# Altium PCB C0 DEVB V1R0.PcbDoc
Units mm, origin at the board's own origin, x right, y up, seen from the top; angles counter-clockwise.
Board outline 60 x 60 mm, 2 copper layers (Top Layer, Bottom Layer); 38 components, 40 nets, 183 pads, 7 vias.
Unrouted connection lines stored in the file: 74.
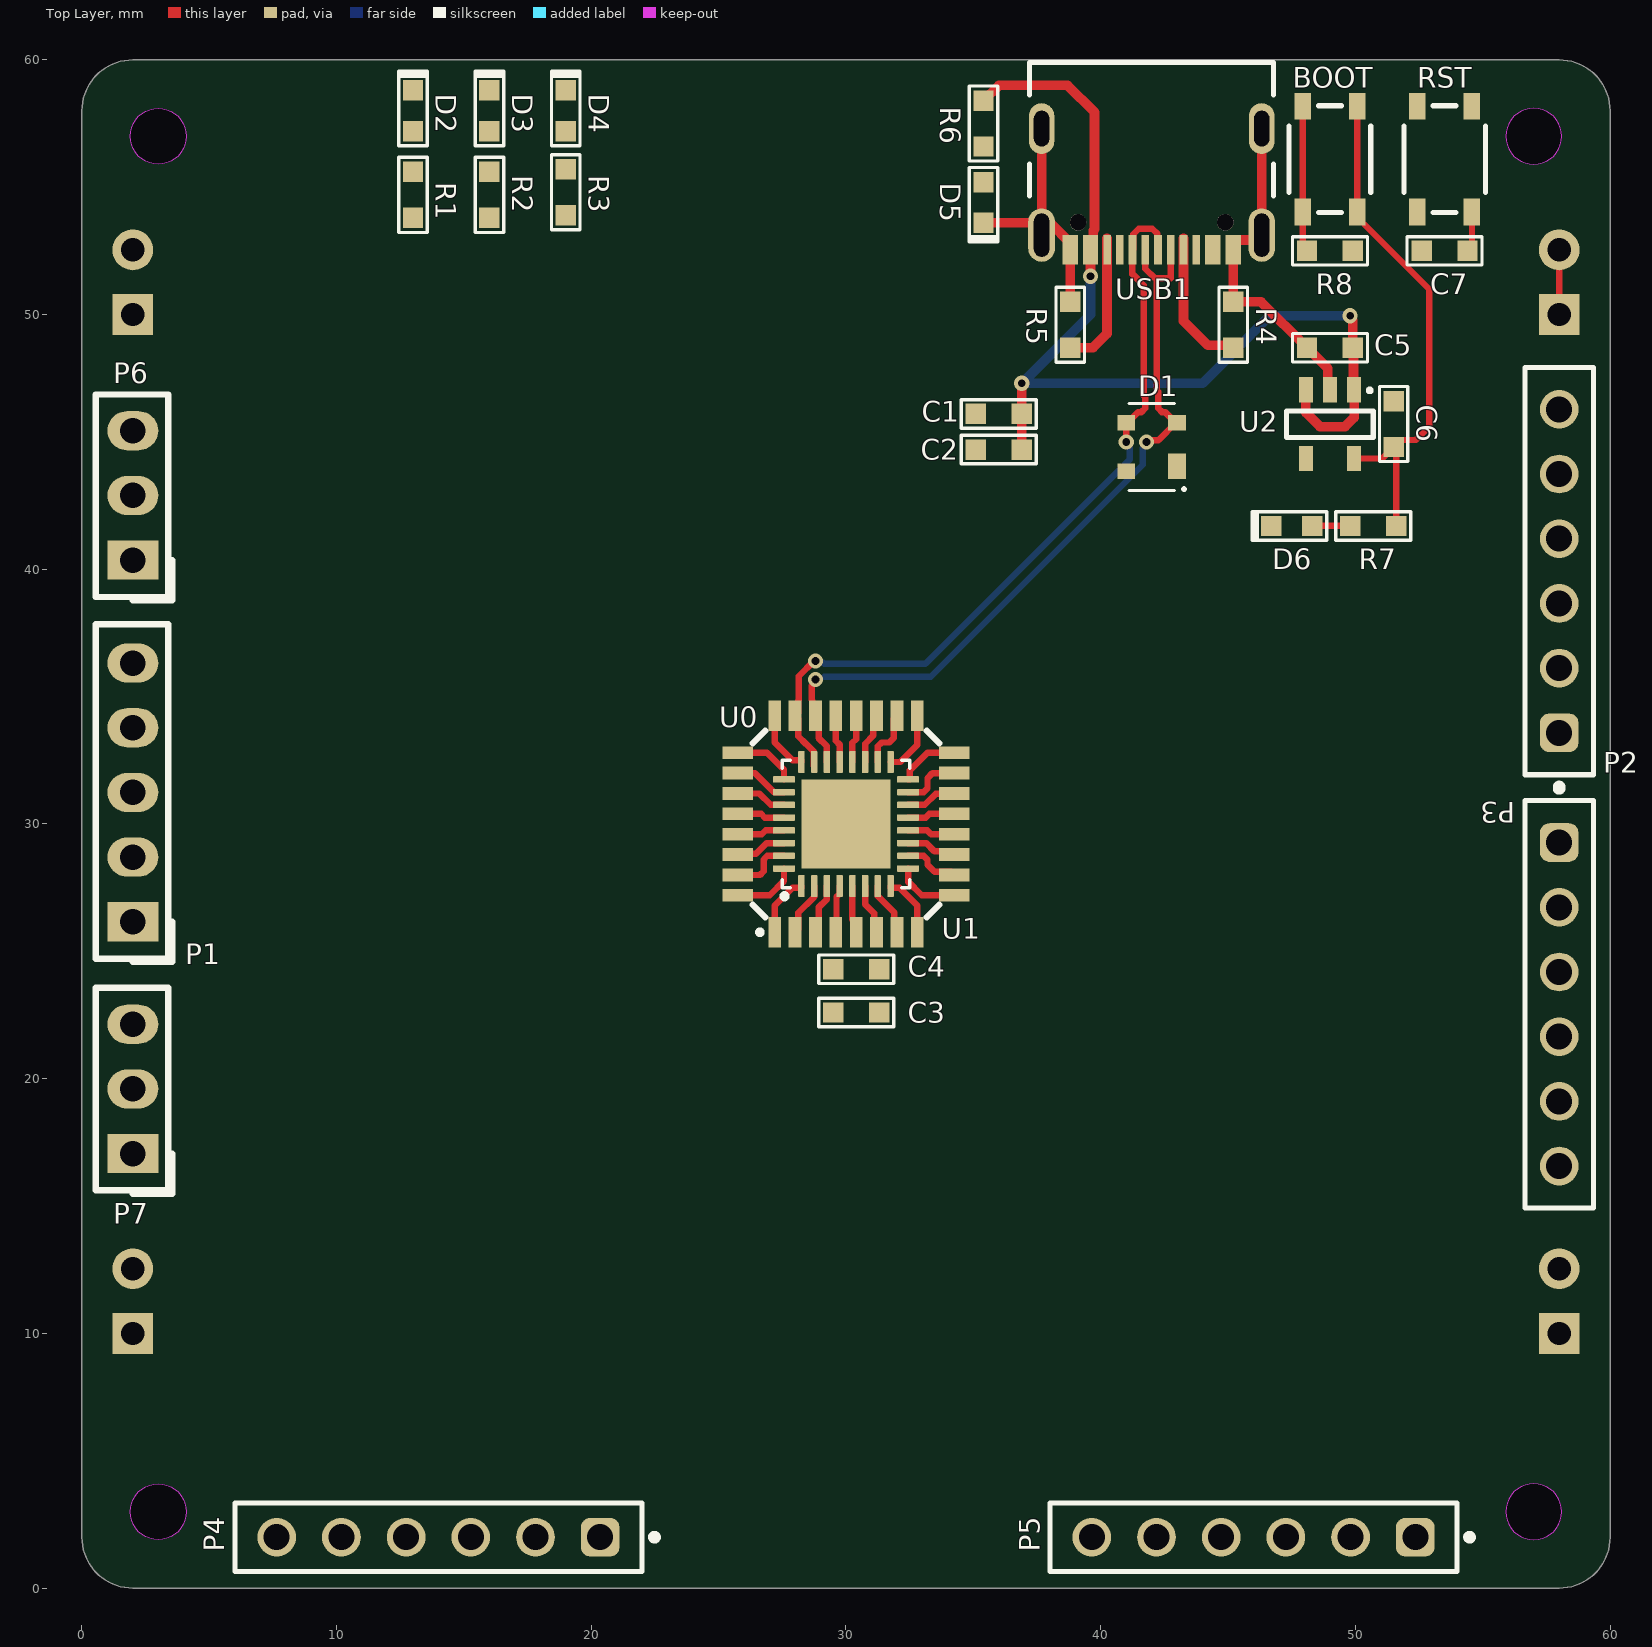
[diagram p0: Top Layer view]
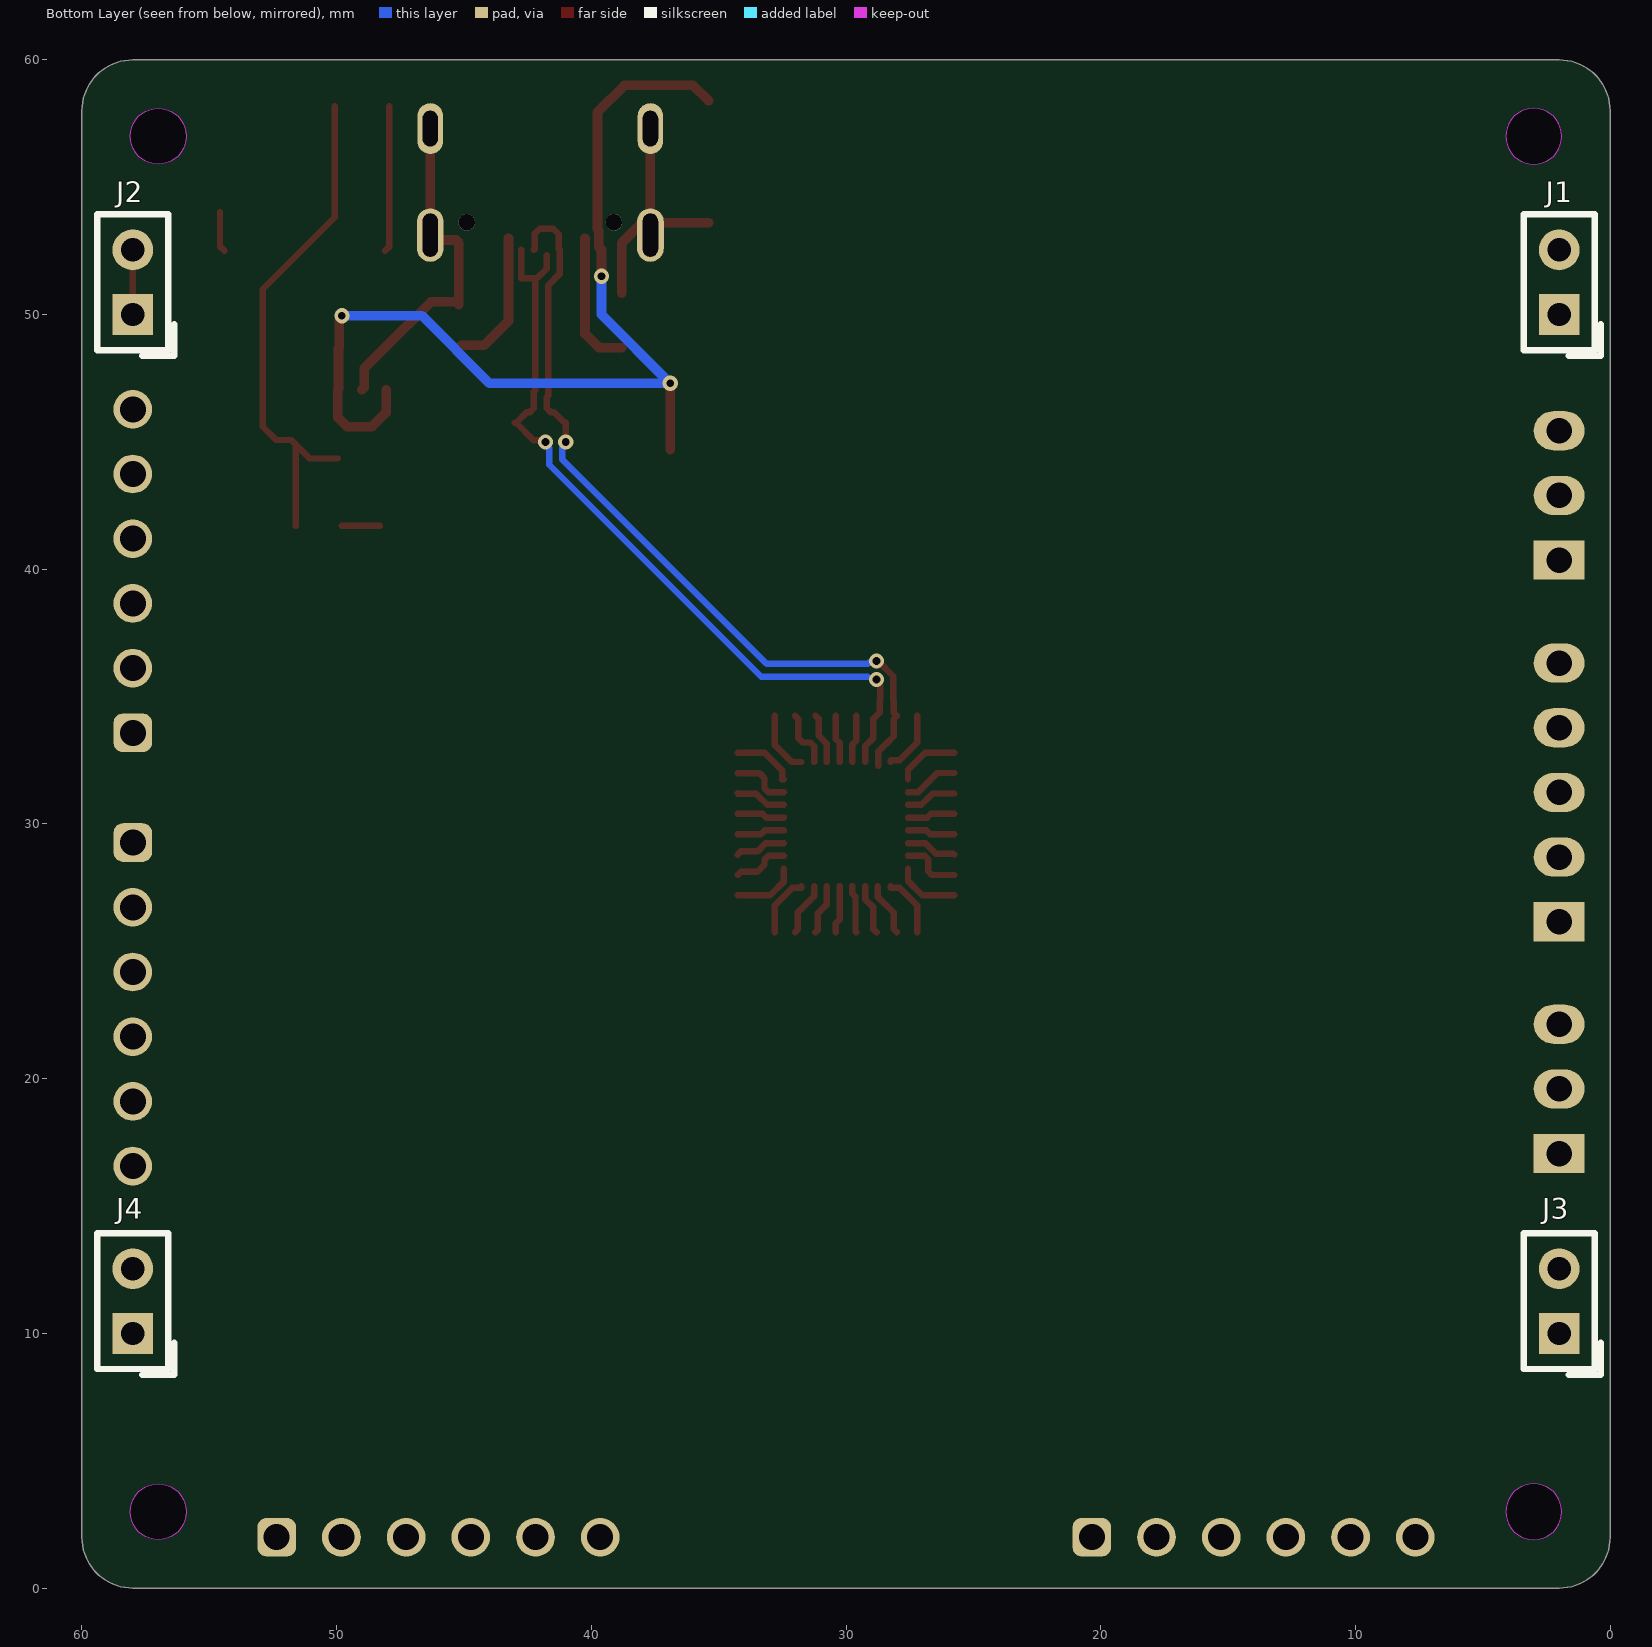
[diagram p1: Bottom Layer view, seen from below]
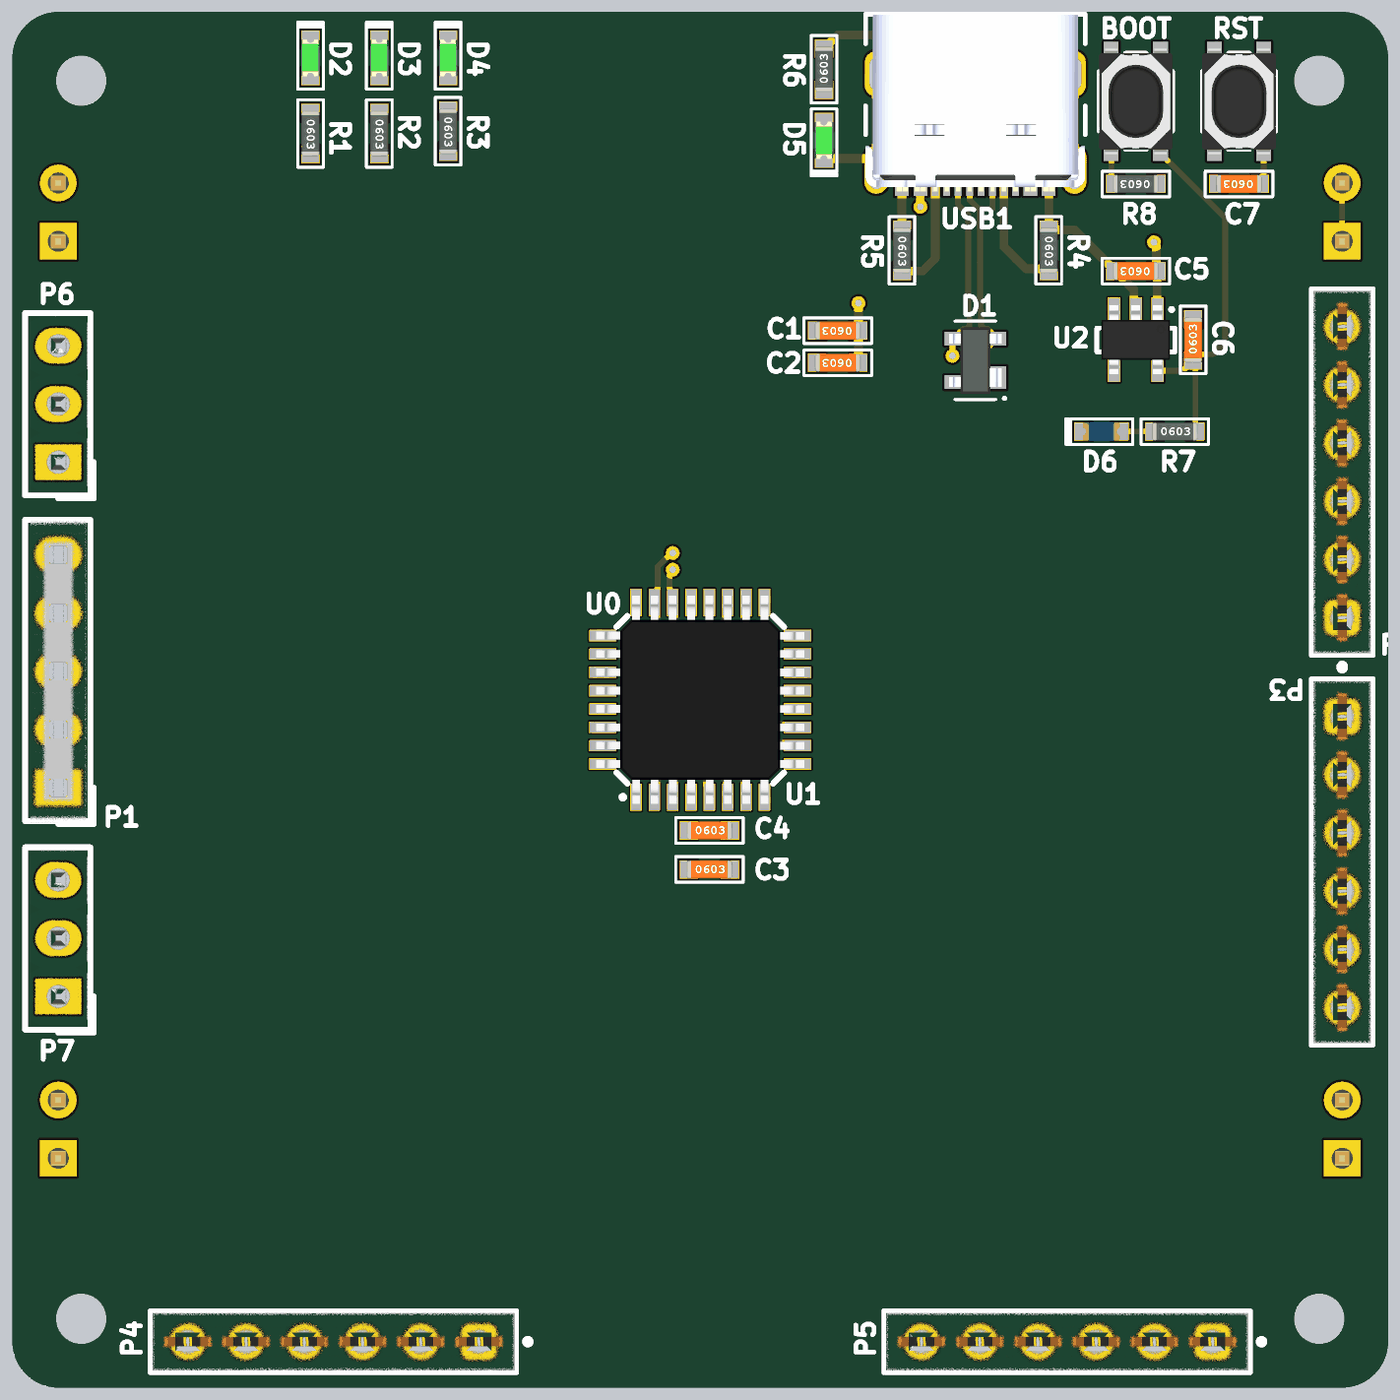
[diagram p2: 3D render of the assembled board from above, using the file's embedded part models]
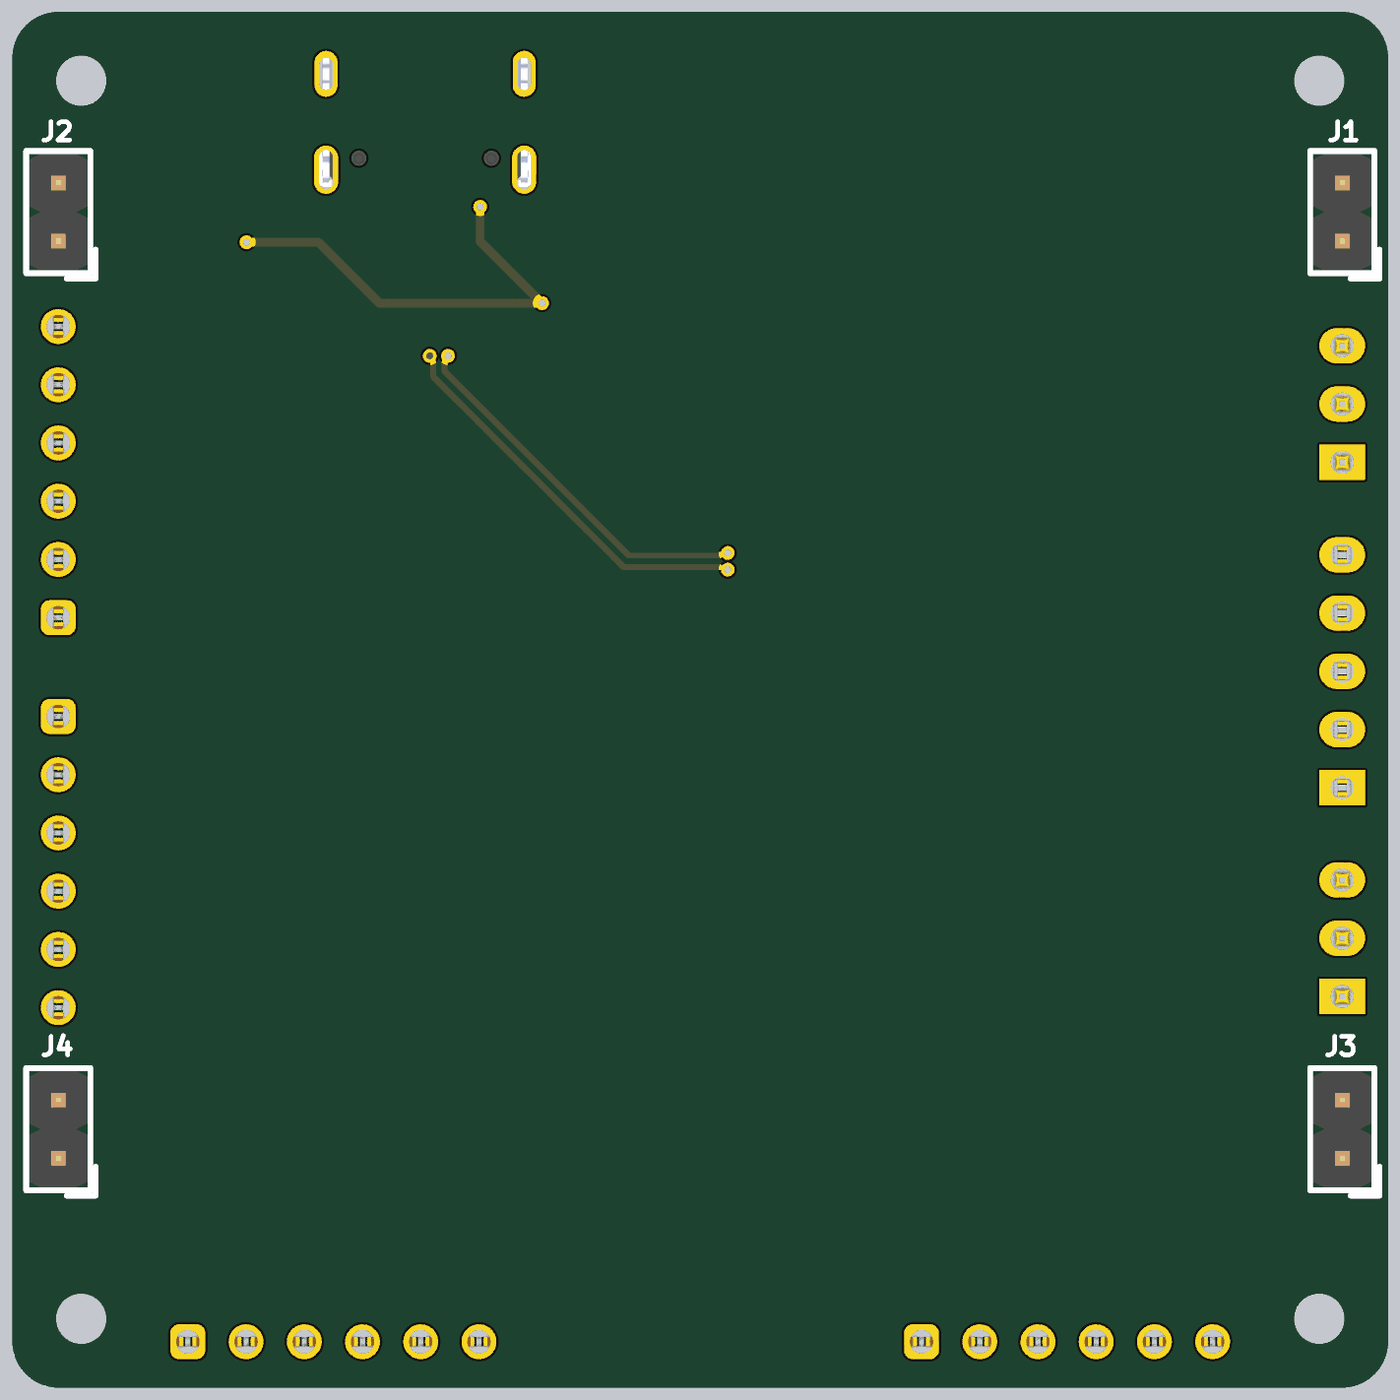
[diagram p3: 3D render of the assembled board from below, using the file's embedded part models]

## Layer stack, top to bottom
Top Solder: solder mask 0.0102, Solder Resist, Dk 3.5
Top Layer: signal copper 0.0356
Dielectric 1: dielectric 0.32, FR-4, Dk 4.8
Bottom Layer: signal copper 0.0356
Bottom Solder: solder mask 0.0102, Solder Resist, Dk 3.5

## Board outline
2,0 cw(c2,2) 0,2 0,58 cw(c2,58) 2,60 58,60 cw(c58,58) 60,58 60,2 cw(c58,2) 58,0
cut-out: 3,55.9 cw(c3,57) 1.9,57 cw(c3,57) 3,58.1 cw(c3,57) 4.1,57 cw(c3,57)
cut-out: 55.9,3 ccw(c57,3) 57,1.9 ccw(c57,3) 58.1,3 ccw(c57,3) 57,4.1 ccw(c57,3)
cut-out: 55.9,57 ccw(c57,57) 57,55.9 ccw(c57,57) 58.1,57 ccw(c57,57) 57,58.1 ccw(c57,57)
cut-out: 3,1.9 cw(c3,3) 1.9,3 cw(c3,3) 3,4.1 cw(c3,3) 4.1,3 cw(c3,3)

## Design rules (kind name [scope] priority, off if disabled: settings)
Clearance Neutral [InNet('NEUTRAL')] p1: gap=0.8 ignorepadtopadclearanceinfootprint=FALSE
Clearance [All] p2: gap=0.127 ignorepadtopadclearanceinfootprint=FALSE
ComponentClearance ComponentClearance_1 [InComponent('U0') vs InComponent('U1')] p1: gap=0 collisioncheckmode=3 verticalgap=0 showdistances=FALSE
ComponentClearance [All] p2: gap=0.254 collisioncheckmode=3 verticalgap=0.254 showdistances=FALSE
DiffPairsRouting [All] p1: maxlimit=0.254 minlimit=0.254 mostfreqgap=0.254 toplayer_minwidth=0.254 toplayer_maxwidth=0.381 toplayer_prefwidth=0.381 bottomlayer_minwidth=0.254 bottomlayer_maxwidth=0.381 bottomlayer_prefwidth=0.381 maxuncoupledlength=12.7
PolygonConnect [All] p1: connectstyle=Direct reliefconductorwidth=0.254 reliefentries=4 polygonreliefangle="90 Angle" airgapwidth=0.254
RoutingVias [All] p1: holewidth=0.3 width=0.6 viastyle="Through Hole" minholewidth=0.3 minwidth=0.6 maxholewidth=1 maxwidth=1.27
SilkToSilkClearance [All] p1: silktosilkclearance=0.01
SilkToSolderMaskClearance [IsPad] p1: minsilkscreentomaskgap=0 clearancetoexposedcopper=TRUE
SolderMaskExpansion [All] p1: expansion=0.102 istentingtop=FALSE
Width [All] p1: maxlimit=4 minlimit=0.1 preferedwidth=0.25
26 further rules are at their usual default settings.

## Classes and differential pairs
differential pair D*: +D*_P -D*_N

## Components (designator, comment, footprint, x,y, rotation, side; value= is the part's Value field where it differs from the comment)
BOOT "434133025816" 434133025816 49,56.1 r270 top
C1 "1uF" 0603-CAP 36,46.1 r180 top
C2 "0.1µF" 0603-CAP 36,44.7 r180 top
C3 "1uF" 0603-CAP 30.4,22.6 r0 top
C4 "0.1µF" 0603-CAP 30.4,24.3 r0 top
C5 "1uF" 0603-CAP 49,48.7 r180 top
C6 "1uF" 0603-CAP 51.5,45.7 r90 top
C7 "0.1µF" 0603-CAP 53.5,52.5 r180 top
D1 "PRTR5V0U2X" SOT143B 42,44.8 r90 top value=1pF
D2 "Green" 0603-LED-GREEN 13,58 r270 top
D3 "Green" 0603-LED-GREEN 16,58 r270 top
D4 "Green" 0603-LED-GREEN 19,58 r270 top
D5 "Green" 0603-LED-GREEN 35.4,54.4 r90 top
D6 "Blue" 0603-LED-BLUE 47.5,41.7 r0 top
J1 "61300211121" 61300211121 2,50 r90 bottom
J2 "61300211121" 61300211121 58,50 r90 bottom
J3 "61300211121" 61300211121 2,10 r90 bottom
J4 "61300211121" 61300211121 58,10 r90 bottom
P1 "PPPC051LFBN-RC" PPPC051LFBN-RC 2,31.24 r90 top
P2 "61300611821" 61300611821 58,39.93 r90 top
P3 "61300611821" 61300611821 58,22.92 r270 top
P4 "61300611821" 61300611821 14,2 r180 top
P5 "61300611821" 61300611821 46,2 r180 top
P6 "61300311121" 61300311121 2,40.36 r90 top
P7 "61300311121" 61300311121 2,17.06 r90 top
R1 "220R" 0603-RES 13,54.7 r270 top
R2 "220R" 0603-RES 16,54.7 r270 top
R3 "220R" 0603-RES 19,54.8 r270 top
R4 "5.1K" 0603-RES 45.2,49.6 r270 top
R5 "5.1K" 0603-RES 38.8,49.6 r270 top
R6 "220R" 0603-RES 35.4,57.5 r90 top
R7 "220R" 0603-RES 50.7,41.7 r0 top
R8 "10K" 0603-RES 49,52.5 r180 top
RST "434133025816" 434133025816 53.5,56.1 r270 top
U0 "STM32G070KBT6" LQFP-32 30,30 r90 top locked
U1 "STM32C071KBU6" QFN32(5x5) 30,30 r90 top
U2 "LDK320AM33R" SOT-23-5 49,45.7 r270 top
USB1 "USB4105-GF-A" USB4105-GF-A 42,57.3 r180 top

## Footprints (in the part's own frame and the unit in brackets; to place one, negate y for a bottom-side part, rotate by r counter-clockwise, add the part's x,y. Pads: shape width x height; smd on the part's side, far side on the other; paste and mask are expansions set on the pad)
0603-CAP [mm]
  rect 0.8x0.8 smd paste-0.03 mask+0.07: 1(-0.9,0) 2(0.9,0)
  silkscreen extent -1.47,-0.56 1.47,0.56, body extent -1,-0.39 1,0.39, height 0.79
0603-LED-BLUE [mm]
  rect 0.8x0.8 smd paste-0.03 mask+0.07: 1(0.8,0) 2(-0.8,0)
  silkscreen extent -1.55,-0.56 1.37,0.56, body extent -0.8,-0.4 0.8,0.4, height 0.7
0603-LED-GREEN [mm]
  rect 0.8x0.8 smd paste-0.03 mask+0.07: 1(0.8,0) 2(-0.8,0)
  silkscreen extent -1.55,-0.56 1.37,0.56, body extent -0.81,-0.4 0.81,0.4, height 0.6
0603-RES [mm]
  rect 0.8x0.8 smd paste-0.03 mask+0.07: 1(-0.9,0) 2(0.9,0)
  silkscreen extent -1.47,-0.56 1.47,0.56, body extent -1,-0.39 1,0.39, height 0.79
61300211121 [mm]
  rect 1.6x1.6 hole 0.914: 1(0,0)
  round 1.6 hole 0.914: 2(2.54,0)
  silkscreen extent -1.63,-1.63 3.94,1.4, body extent -1.27,-1.27 3.81,1.27, height 8.54
61300311121 [mm] "CONN HEADER 6POS .100 STR TIN"
  rect 1.54x2 hole 1: 1(0,0)
  oval 1.54x2 hole 1: 2(2.54,0) 3(5.08,0)
  silkscreen extent -1.57,-1.55 6.5,1.45, body extent -1.27,-1.27 6.35,1.27, height 8.54
61300611821 [mm] "Socket Header, Pitch 2.54 mm, THT, Vertical, single row, 6p"
  rrect50% 1.52x1.52 hole 1.02: 1(-6.35,0)
  round 1.52 hole 1.02: 2(-3.81,0) 3(-1.27,0) 4(1.27,0) 5(3.81,0) 6(6.35,0)
  silkscreen extent -8.6,-1.35 8,1.35, body extent -7.87,-1.25 7.87,1.25, height 8.55
434133025816 [mm] "Tact Switch, SMD, body 4.2x3.2mm"
  rect 1.05x0.65 smd: A1(-2.075,1.075) A2(2.075,1.075) B1(-2.075,-1.075) B2(2.075,-1.075)
  silkscreen extent -2.1,-1.6 2.1,1.6, body extent -2.3,-1.6 2.3,1.6, height 2.5
LQFP-32 [mm]
  rect 1.2x0.5 smd paste-0.03 mask+0.07: 1(-4.25,2.8) 2(-4.25,2) 3(-4.25,1.2) 4(-4.25,0.4) 5(-4.25,-0.4) 6(-4.25,-1.2) 7(-4.25,-2) 8(-4.25,-2.8) 17(4.25,-2.8) 18(4.25,-2) 19(4.25,-1.2) 20(4.25,-0.4) 21(4.25,0.4) 22(4.25,1.2) 23(4.25,2) 24(4.25,2.8)
  rect 0.5x1.2 smd paste-0.03 mask+0.07: 9(-2.8,-4.25) 10(-2,-4.25) 11(-1.2,-4.25) 12(-0.4,-4.25) 13(0.4,-4.25) 14(1.2,-4.25) 15(2,-4.25) 16(2.8,-4.25) 25(2.8,4.25) 26(2,4.25) 27(1.2,4.25) 28(0.4,4.25) 29(-0.4,4.25) 30(-1.2,4.25) 31(-2,4.25) 32(-2.8,4.25)
  silkscreen extent -4.29,-3.66 3.66,3.66, body extent -4.54,-4.54 4.54,4.54, height 1.43
PPPC051LFBN-RC [mm] "CONN HDR 6POS 0.1 GOLD PCB R/A"
  rect 1.54x2 hole 1: 1(-5.08,0)
  oval 1.54x2 hole 1: 2(-2.54,0) 3(0,0) 4(2.54,0) 5(5.08,0)
  silkscreen extent -6.65,-1.55 6.6,1.45, body extent -6.6,-1.21 6.6,1.21, height 8.51
QFN32(5x5) [mm]
  rrect25% 0.86x0.25 smd: 1(-2.435,1.75) 2(-2.435,1.25) 3(-2.435,0.75) 4(-2.435,0.25) 5(-2.435,-0.25) 6(-2.435,-0.75) 7(-2.435,-1.25) 8(-2.435,-1.75) 17(2.435,-1.75) 18(2.435,-1.25) 19(2.435,-0.75) 20(2.435,-0.25) 21(2.435,0.25) 22(2.435,0.75) 23(2.435,1.25) 24(2.435,1.75)
  rrect25% 0.25x0.86 smd: 9(-1.75,-2.435) 10(-1.25,-2.435) 11(-0.75,-2.435) 12(-0.25,-2.435) 13(0.25,-2.435) 14(0.75,-2.435) 15(1.25,-2.435) 16(1.75,-2.435) 25(1.75,2.435) 26(1.25,2.435) 27(0.75,2.435) 28(0.25,2.435) 29(-0.25,2.435) 30(-0.75,2.435) 31(-1.25,2.435) 32(-1.75,2.435)
  rect 3.5x3.5 smd paste-3: 33(0,0)
  silkscreen extent -2.94,-2.5 2.5,2.51, body extent -2.5,-2.5 2.5,2.5, height 0.6
SOT143B [mm]
  rect 1x0.7 smd: 1(-0.75,-1)
  rect 0.6x0.7 smd: 2(0.95,-1) 3(0.95,1) 4(-0.95,1)
  silkscreen extent -1.7,-1.32 1.71,0.89, body extent -1.45,-1.15 1.45,1.15, height 1.1
SOT-23-5 [mm] "SOT23,5-Leads, Body 2.9x1.6mm, Pitch 0.95mm, Lead Span 2.7mm, IPC Medium Density"
  rect 1x0.55 smd paste-0.03 mask+0.07: 1(-1.35,0.95) 2(-1.35,0) 3(-1.35,-0.95) 4(1.35,-0.95) 5(1.35,0.95)
  silkscreen extent -1.38,-1.7 0.53,1.7, body extent -1.5,-1.51 1.5,1.49, height 1.45
USB4105-GF-A [mm]
  rect 0.6x1.15 smd: A1_B12(-3.2,4.755) A4_B9(-2.4,4.755) B1_A12(3.2,4.755) B4_A9(2.4,4.755)
  rect 0.3x1.15 smd: A5(-1.25,4.755) A6(-0.25,4.755) A7(0.25,4.755) A8(1.25,4.755) B5(1.75,4.755) B6(0.75,4.755) B7(-0.75,4.755) B8(-1.75,4.755)
  oval 1.05x2.1 hole 0.6 slot 1.7 at 90 deg: S1(-4.32,4.18) S4(4.32,4.18)
  oval 1x2 hole 0.6 slot 1.4 at 90 deg: S2(-4.32,0) S3(4.32,0)
  round 0.65 hole 0.65 unplated: ""(-2.89,3.68) ""(2.89,3.68)
  silkscreen extent -4.79,-2.6 4.79,2.65, body extent -4.79,-2.59 4.79,5.13, height 3.31

## Part data
BOOT RST: library part CMP-03913-99472342-2, "Tactile Switch, 0.05A, 16Vdc, 160Gf, Smd Rohs Compliant: Yes", Current Rating=50mA, Insulation Resistance=100MΩ, Max Operating Temperature=85°C, Min Operating Temperature=-40°C, Voltage Rating=16V, Contact Plating=Silver, Height=2.5mm, Packaging="Tape and Reel", RoHS=Compliant
C1 C3 C5 C6: library part CL10B105KA8NNNC, "CAP CER 1UF 25V X7R 0603", Case Code (Imperial)=0603, Case Code (Metric)=1608, Dielectric=X7R, Manufacturer=Samsung, Max Operating Temperature=125°C, Min Operating Temperature=-55°C, Package Quantity=1, Supplier Part Number 1=1276-1184-1-ND, Tolerance=10%, Voltage=25V, Capacitance=1uF, Case/Package=0603, Category="Ceramic Capacitors", ComponentLink1Description=https://datasheet.ciiva.com/16449/cl10b105ka8nnnc-16449544.pdf?src-supplier=Future+Electronics, ComponentLink1URL=https://datasheet.ciiva.com/16449/cl10b105ka8nnnc-16449544.pdf?src-supplier=Future+Electronics, ComponentLink2Description=https://datasheet.ciiva.com/15195/getdatasheetpartid-359554-15195726.pdf?src-supplier=Verical, ComponentLink2URL=https://datasheet.ciiva.com/15195/getdatasheetpartid-359554-15195726.pdf?src-supplier=Verical, Construction=Flat, Contact Plating=Tin, Depth=0.8mm, Height=0.8mm, Length=1.6mm, Manufacturer Part Number=CL10B105KA8NNNC, Mount="Surface Mount", Packaging="Tape and Reel", Pricing 1="1=0,10000, 10=0,04500, 50=0,02460, 100=0,02010, 500=0,01436, 1000=0,01128 (USD)", Radiation Hardening=No, RoHS=Yes, RoHS Compliant=Yes, Series=CL, Supplier 1=Digi-Key, Thickness=0.035inch, Voltage Rating=25V, Width=0.031inch
C2: library part 06033C104JAZ2A, "CAP CER 0.1UF 25V X7R 0603", Manufacturer="AVX Corporation", Operating Temperature="-55°C ~ 125°C", Package / Case="0603 (1608 Metric)", Ratings=-, Supplier Part Number 1=478-10279-1-ND, Temperature Coefficient=X7R, Tolerance=±5%, Voltage - Rated=25V, Applications="Boardflex Sensitive", Category=Capacitors, ComponentLink1Description=http://datasheets.avx.com/FlexitermMLCC.pdf, ComponentLink1URL=http://datasheets.avx.com/FlexitermMLCC.pdf, Failure Rate=-, Features="Soft Termination", Height - Seated (Max)=-, Lead Spacing=-, Lead Style=-, Manufacturer Part Number=06033C104JAZ2A, Mounting Type="Surface Mount, MLCC", Packaging="Cut Tape (CT)", Part Status=Active, Pricing 1="1=0.13, 10=0.094, 100=0.044, 500=0.03086, 1000=0.02555 (USD)", RoHS="RoHS Compliant", Size / Dimension="0.063\" L x 0.032\" W (1.60mm x 0.80mm)", Stock 1=19625, Supplier 1=Digi-Key, Thickness (Max)="0.035\" (0.90mm)"
C4 C7: library part CL10B104KB8NNNL, "CAP CER 0.1UF 50V X7R 0603", Capacitance=100nF, Case/Package=0603, Dielectric=X7R, Manufacturer=Samsung, Max Operating Temperature=125°C, Min Operating Temperature=-55°C, Package Quantity=15000, Supplier Part Number 1=1276-CL10B104KB8NNNLCT-ND, Tolerance=10%, Voltage Rating=50V, ComponentLink1Description=https://datasheet.ciiva.com/25741/cl10b104kb8nnnl-25741341.pdf?src-supplier=Digi-Key, ComponentLink1URL=https://datasheet.ciiva.com/25741/cl10b104kb8nnnl-25741341.pdf?src-supplier=Digi-Key, ComponentLink2Description=https://datasheet.ciiva.com/26838/getdatasheetpartid-357523-26838415.pdf?src-supplier=Verical, ComponentLink2URL=https://datasheet.ciiva.com/26838/getdatasheetpartid-357523-26838415.pdf?src-supplier=Verical, Depth=0.8mm, Height=0.8mm, Length=1.6mm, Manufacturer Part Number=CL10B104KB8NNNL, Mount="Surface Mount", Packaging="Tape and Reel", Pricing 1="1 = 0,10000, 10 = 0,03000, 100 = 0,01350, 500 = 0,00966, 1000 = 0,00759, 2500 = 0,00690, 5000 = 0,00635 (USD)", Radiation Hardening=No, RoHS=Yes, Stock 1=1583462, Supplier 1=Digi-Key, Thickness=0.035inch, Voltage Rating (DC)=50V, Width=0.031inch
D1: "TVS DIODE 5.5VWM SOT143B", Breakdown Voltage=6V, Manufacturer 1=Nexperia, Manufacturer Part  1=PRTR5V0U2X,215, Operating Supply Voltage=700mV, Reverse Standoff Voltage=5.5V, Supplier Part Number 1=1727-3884-1-ND, Category="ESD and Circuit Protection ICs", ComponentLink1Description=http://www.farnell.com/datasheets/109718.pdf?src-supplier=Farnell, ComponentLink1URL=http://www.farnell.com/datasheets/109718.pdf?src-supplier=Farnell, ComponentLink2Description=https://assets.nexperia.com/documents/data-sheet/PRTR5V0U2X.pdf?src-supplier=Digikey, ComponentLink2URL=https://assets.nexperia.com/documents/data-sheet/PRTR5V0U2X.pdf?src-supplier=Digikey, ComponentLink3Description=https://datasheet.octopart.com/PRTR5V0U2X%2C215-Nexperia-datasheet-5405949.pdf?src-supplier=Element14, ComponentLink3URL=https://datasheet.octopart.com/PRTR5V0U2X%2C215-Nexperia-datasheet-5405949.pdf?src-supplier=Element14, ComponentLink4Description=http://www.farnell.com/datasheets/109718.pdf?src-supplier=Newark, ComponentLink4URL=http://www.farnell.com/datasheets/109718.pdf?src-supplier=Newark, Direction=211Direction, Height=1.1mm, Number of Channels=2NUMBER, Pins=4NUMBER, Pricing 1="1=0,4, 10=0,346, 100=0,2402, 500=0,18754, 1000=0,15243 (USD)", RoHS=Yes, RoHS Compliant=Yes, Stock 1=43284, Supplier 1=Digikey
D2 D3 D4 D5: library part 150060VS75000, "LED GREEN CLEAR 0603 SMD", Case Code (Imperial)=0603, Case Code (Metric)=1608, Forward Current=30mA, Forward Voltage=2V, Manufacturer 1="Wurth Electronics", Max Operating Temperature=85°C, Min Operating Temperature=-40°C, Package Quantity=1, Supplier Part Number 1=732-4980-1-ND, Test Current=20mA, Case/Package=0603, Color=Green, ComponentLink1Description=https://datasheet.ciiva.com/29562/150060vs75000-29562919.pdf?src-supplier=Digi-Key, ComponentLink1URL=https://datasheet.ciiva.com/29562/150060vs75000-29562919.pdf?src-supplier=Digi-Key, Dominant Wavelength=570nm, Height=0.7mm, Length=1.6mm, Lens Style=Clear,Rectangular, Luminous Intensity=40mcd, Manufacturer Part Number 1=150060VS75000, Mount="Surface Mount", Number of Pins=2, Packaging="Tape and Reel", Pricing 1="1=0,14000, 50=0,13300, 100=0,11550 (USD)", REACH SVHC=Unknown, RoHS=Yes, RoHS Compliant=Yes, Stock 1=114121, Supplier 1=Digi-Key, Viewing Angle=140°, Wavelength=570nm, Width=0.8mm
D6: library part 150060BS75000, "LED BLUE CLEAR 0603 SMD", Case Code (Imperial)=0603, Case Code (Metric)=1608, Forward Current=30mA, Forward Voltage=3.2V, Manufacturer="Wurth Electronics", Max Operating Temperature=85°C, Min Operating Temperature=-40°C, Package Quantity=4000, Supplier Part Number 1=732-4966-1-ND, Test Current=20mA, Case/Package=0603, Color=Blue, ComponentLink1Description=https://datasheet.ciiva.com/29563/150060bs75000-29563034.pdf?src-supplier=Digi-Key, ComponentLink1URL=https://datasheet.ciiva.com/29563/150060bs75000-29563034.pdf?src-supplier=Digi-Key, ComponentLink2Description=https://datasheet.ciiva.com/29279/759426-da-01-en-chipled-0603-w-kl-blau-150060bs75000-29279193.pdf?src-supplier=Conrad, ComponentLink2URL=https://datasheet.ciiva.com/29279/759426-da-01-en-chipled-0603-w-kl-blau-150060bs75000-29279193.pdf?src-supplier=Conrad, ComponentLink3Description=https://datasheet.ciiva.com/48430/150060bs75000-eng-tds-48430039.pdf?src-supplier=Distrelec, ComponentLink3URL=https://datasheet.ciiva.com/48430/150060bs75000-eng-tds-48430039.pdf?src-supplier=Distrelec, ComponentLink4Description=https://datasheet.ciiva.com/22656/1911343-22656939.pdf?src-supplier=Element14, ComponentLink4URL=https://datasheet.ciiva.com/22656/1911343-22656939.pdf?src-supplier=Element14, ComponentLink5Description=https://datasheet.ciiva.com/29563/150060bs75000-29563035.pdf?src-supplier=Digi-Key, ComponentLink5URL=https://datasheet.ciiva.com/29563/150060bs75000-29563035.pdf?src-supplier=Digi-Key, ComponentLink6Description=https://datasheet.ciiva.com/29563/150060bs75000-29563036.pdf?src-supplier=Digi-Key, ComponentLink6URL=https://datasheet.ciiva.com/29563/150060bs75000-29563036.pdf?src-supplier=Digi-Key, Dominant Wavelength=470nm, Height=0.7mm, Length=1.6mm, Lens Style=Clear,Rectangular, Luminous Intensity=145mcd, Manufacturer Part Number=150060BS75000, Mount="Surface Mount", Packaging="Cut Tape", Pricing 1="1 = 0,16000, 50 = 0,14500, 100 = 0,12500, 500 = 0,10800 (USD)", REACH SVHC=Unknown, RoHS=Yes, Stock 1=27240, Supplier 1=Digi-Key, Viewing Angle=140°, Wavelength=470nm, Width=0.8mm
J1 J2 J3 J4: "CONN HEADER VERT 2POS 2.54MM", Color=Black, Current Rating=3A, Manufacturer="Wurth Electronics", Max Operating Temperature=125°C, Min Operating Temperature=-40°C, Supplier Part Number 1=732-5315-ND, Voltage Rating=250V, ComponentLink1Description=https://datasheet.ciiva.com/13619/6130xx11121-48870-13619345.pdf?src-supplier=Mouser, ComponentLink1URL=https://datasheet.ciiva.com/13619/6130xx11121-48870-13619345.pdf?src-supplier=Mouser, Connector Type="Male Pin", Contact Gender=Male, Contact Material="Copper Alloy,Copper", Contact Mating Length=0.236inch, Contact Plating=Gold, Gender=Male, Housing Material=PBT, Lead Free="Lead Free", Manufacturer Part Number=61300211121, Mount="Through Hole", Number of Contacts=2, Number of Positions=2, Number of Rows=1, Packaging=Bulk, Pitch=0.1inch, Pricing 1="1 = 0,13000, 10 = 0,10600, 25 = 0,08800, 50 = 0,07400, 100 = 0,06700, 1000 = 0,06100 (USD)", REACH SVHC=Unknown, RoHS=Yes, Stock 1=102087, Supplier 1=Digi-Key, Termination="Through Hole"
P1: "CONN HDR 5POS 0.1 GOLD PCB", Color=Black, Manufacturer 1=Sullins, Package Quantity=1000, Supplier Part Number 1=S7038-ND, Category=Connectors, ComponentLink1Description=https://media.digikey.com/pdf/Data%20Sheets/Sullins%20PDFs/Female_Headers.100_DS.pdf?src-supplier=Digi-Key, ComponentLink1URL=https://media.digikey.com/pdf/Data%20Sheets/Sullins%20PDFs/Female_Headers.100_DS.pdf?src-supplier=Digi-Key, ComponentLink2Description=http://www.sullinscorp.com/catalogs/78_Page80-81_HEADER_.100_2.54mm_FEMALE.pdf?src-supplier=Future+Electronics, ComponentLink2URL=http://www.sullinscorp.com/catalogs/78_Page80-81_HEADER_.100_2.54mm_FEMALE.pdf?src-supplier=Future+Electronics, Connector Type=Header, Contact Material=Bronze, Contact Plating=Gold, Contact Type="Female Socket", Height=8.5mm, Housing Material=Plastic, Lead Free="Lead Free", Length=13.2mm, Manufacturer Part Number 1=PPPC051LFBN-RC, Mount="Through Hole", Number of Positions=5, Number of Rows=1, Packaging=Bulk, Pitch=0.1inch, Pricing 1="1=0,49000, 10=0,45900, 100=0,35190, 500=0,30600, 1000=0,25245, 5000=0,22185, 10000=0,22100 (USD)", RoHS=Yes, RoHS Compliant=Yes, Stock 1=13836, Supplier 1=Digi-Key, Termination=Solder, Width=2.5mm
P2 P3 P4 P5: library part CMP-1502-01322-3, Contact Resistance=20mΩ, Current Rating=3A, Operating Supply Voltage=250V, Gender=Female, Lead Pitch=2.54mm, NexarPartId=21642411, Number of Pins=6, Orientation=Vertical, RoHS=Compliant
P6 P7: "CONN HEADER VERT 3POS 2.54MM", Color=Black, Manufacturer="Wurth Electronics", Supplier Part Number 1=732-5316-ND, ComponentLink1Description=http://www.farnell.com/cad/1737268.pdf?src-supplier=Element14, ComponentLink1URL=http://www.farnell.com/cad/1737268.pdf?src-supplier=Element14, ComponentLink2Description=https://katalog.we-online.de/em/datasheet/6130xx11121.pdf?src-supplier=Digi-Key, ComponentLink2URL=https://katalog.we-online.de/em/datasheet/6130xx11121.pdf?src-supplier=Digi-Key, Connector Type="Male Pin", Contact Material=Copper, Contact Mating Length=0.236inch, Contact Plating=Gold, Gender=Male, Lead Free="Lead Free", Manufacturer Part Number=61300311121, Mount="Through Hole", Number of Contacts=3, Number of Positions=3, Number of Rows=1, Packaging=Bulk, Pitch=0.1inch, Pricing 1="1 = 0,13000, 10 = 0,10600, 25 = 0,08800, 50 = 0,07400, 100 = 0,06700, 1000 = 0,06100 (USD)", REACH SVHC=Unknown, RoHS=Yes, Stock 1=87341, Supplier 1=Digi-Key, Termination=Solder
R1 R2 R3 R6 R7: library part CPF-A-0603B220RE, "RES SMD 220 OHM 0.1% 1/16W 0603", Case Code (Imperial)=0603, Case Code (Metric)=1608, Manufacturer="TE Connectivity", Max Operating Temperature=155°C, Max Power Dissipation=63mW, Min Operating Temperature=-55°C, Supplier Part Number 1=A123979CT-ND, Temperature Coefficient=25ppm/°C, Tolerance=0.1%, Case/Package=0603, Composition="Thin Film", Features="Moisture Resistant,Automotive AEC-Q200,Anti-Sulfur", Manufacturer Part Number=CPF-A-0603B220RE, Number of Terminations=2, Packaging="Tape and Reel", Pricing 1="1=0.54, 10=0.384, 100=0.1999, 1000=0.10762, 2500=0.10616 (USD)", Resistance=220R, Stock 1=4490, Supplier 1=Digi-Key
R4 R5: library part CPF-A-0603B220RE, "RES SMD TBD OHM 0.1% 1/16W 0603", Case Code (Imperial)=0603, Case Code (Metric)=1608, Manufacturer="TE Connectivity", Max Operating Temperature=155°C, Max Power Dissipation=63mW, Min Operating Temperature=-55°C, Resistance=TBD, Supplier Part Number 1=A123979CT-ND, Temperature Coefficient=25ppm/°C, Tolerance=0.1%, Case/Package=0603, Composition="Thin Film", Features="Moisture Resistant,Automotive AEC-Q200,Anti-Sulfur", Number of Terminations=2, Packaging="Tape and Reel", Pricing 1="1=0.54, 10=0.384, 100=0.1999, 1000=0.10762, 2500=0.10616 (USD)", Stock 1=4490, Supplier 1=Digi-Key
R8: library part RC0603FR-0710KL, "RES SMD 10K OHM 1% 1/10W 0603", Case Code (Imperial)=0603, Case Code (Metric)=1608, Manufacturer 1=Yageo, Max Operating Temperature=155°C, Min Operating Temperature=-55°C, Power Rating=100mW, Resistance=10kR, Supplier Part Number 1=311-10.0KHRCT-ND, Temperature Coefficient=100ppm/°C, Tolerance=1%, Voltage Rating=75V, Voltage Rating (DC)=50V, Case/Package=0603, ComponentLink1Description=https://datasheet.ciiva.com/7660/38590-7660789.pdf?src-supplier=Element14, ComponentLink1URL=https://datasheet.ciiva.com/7660/38590-7660789.pdf?src-supplier=Element14, ComponentLink2Description=https://datasheet.ciiva.com/22747/443971-22747519.pdf?src-supplier=Element14, ComponentLink2URL=https://datasheet.ciiva.com/22747/443971-22747519.pdf?src-supplier=Element14, ComponentLink3Description=https://datasheet.ciiva.com/15189/getdatasheetpartid-409289-15189591.pdf?src-supplier=Verical, ComponentLink3URL=https://datasheet.ciiva.com/15189/getdatasheetpartid-409289-15189591.pdf?src-supplier=Verical, ComponentLink4Description=https://datasheet.ciiva.com/46440/1868787-46440891.pdf?src-supplier=Element14, ComponentLink4URL=https://datasheet.ciiva.com/46440/1868787-46440891.pdf?src-supplier=Element14, ComponentLink5Description=https://datasheet.ciiva.com/7983/443971-7983596.pdf?src-supplier=Element14, ComponentLink5URL=https://datasheet.ciiva.com/7983/443971-7983596.pdf?src-supplier=Element14, ComponentLink6Description=https://datasheet.ciiva.com/7746/1738695-7746239.pdf?src-supplier=Element14, ComponentLink6URL=https://datasheet.ciiva.com/7746/1738695-7746239.pdf?src-supplier=Element14, Composition="Thick Film", Depth=0.8mm, Height=0.45mm, Lead Free="Lead Free", Lead Pitch=0.3mm, Length=1.6mm, Manufacturer Part Number 1=RC0603FR-0710KL, Military Standard=Not, Number of Pins=2, Packaging="Tape and Reel", Pricing 1="1=0,10000, 10=0,02300, 100=0,00940, 1000=0,00421, 2500=0,00366 (USD)", REACH SVHC="No SVHC", RoHS=Yes, Stock 1=45404531, Supplier 1=Digi-Key, Termination=SMD/SMT, Weight=7.1E-05oz, Width=0.8mm
U0: "IC MCU 32BIT 128KB FLASH 32LQFP", Case/Package=LQFP, Manufacturer 1=STMicroelectronics, Max Frequency=64MHz, Max Operating Temperature=85°C, Max Supply Voltage=3.6V, Min Operating Temperature=-40°C, Min Supply Voltage=2V, Package Quantity=250, Supplier Part Number 1=497-STM32G070KBT6-ND, Category=Microcontrollers, ComponentLink1Description=https://datasheet.ciiva.com/71223/stm32g070cb-1517433-71223599.pdf?src-supplier=Mouser, ComponentLink1URL=https://datasheet.ciiva.com/71223/stm32g070cb-1517433-71223599.pdf?src-supplier=Mouser, Core Architecture=ARM, Data Bus Width=32b, Interface=I2C,SPI,I2S,USART,LIN, Manufacturer Part Number 1=STM32G070KBT6, Memory Size=128KB, Memory Type=FLASH, Number of ADC Channels=13, Number Of I/Os=29, Pricing 1="1=1,75000, 10=1,57400, 25=1,48520, 100=1,26520, 250=1,18800, 500=1,03950, 1000=0,86130, 2500=0,80190, 5000=0,77220 (USD)", RAM Size=36KB, RoHS=No, Stock 1=987, Supplier 1=Digi-Key
U1: "IC MCU 32BIT 128KB FLSH 32UFQFPN", Case/Package=UFQFPN, Frequency=48MHz, Manufacturer=STMicroelectronics, Max Operating Temperature=85°C, Min Operating Temperature=-40°C, Supplier Part Number 1=497-18357-ND, Category=Microcontrollers, ComponentLink1Description=https://www.st.com/resource/en/datasheet/stm32g071cb.pdf?src-supplier=Digi-Key, ComponentLink1URL=https://www.st.com/resource/en/datasheet/stm32g071cb.pdf?src-supplier=Digi-Key, Core Architecture=ARM, Interface=I2C,SPI,USB,HDMI,IrDA,UART,USART, Manufacturer Part Number=STM32C071KBU6, Memory Size=128KB, Memory Type=FLASH, Number Of I/Os=30, Oscillator Type=Internal, Packaging=Tray, Peripherals="Brown-out Detect/Reset,POR,PWM,WDT,DMA", Pricing 1="1=3,90000, 10=3,49900, 25=3,30800, 80=2,86700, 230=2,71996, 440=2,45041 (USD)", RoHS=No, Supplier 1=Digi-Key
U2: "IC REG LINEAR 3.3V 200MA SOT23-5", Case/Package=SOT-23-5, Dropout Voltage=350mV, Manufacturer=STMicroelectronics, Max Input Voltage=18V, Max Operating Temperature=125°C, Max Supply Current=100uA, Min Operating Temperature=-40°C, Min Output Voltage=3.3V, Output Current=200mA, Power Supply Rejection Ratio (PSRR)=88dB, Quiescent Current=90uA, Supplier Part Number 1=497-16702-1-ND, Category="Voltage Regulators - Linear", ComponentLink1Description=http://www.farnell.com/datasheets/2342740.pdf?src-supplier=Farnell, ComponentLink1URL=http://www.farnell.com/datasheets/2342740.pdf?src-supplier=Farnell, ComponentLink2Description=https://www.st.com/resource/en/datasheet/ldk320.pdf?src-supplier=Digi-Key, ComponentLink2URL=https://www.st.com/resource/en/datasheet/ldk320.pdf?src-supplier=Digi-Key, ComponentLink3Description=http://www.farnell.com/datasheets/2342740.pdf?src-supplier=Newark, ComponentLink3URL=http://www.farnell.com/datasheets/2342740.pdf?src-supplier=Newark, Manufacturer Part Number=LDK320AM33R, Mount="Surface Mount", Number of Regulators=1, Output Configuration=Positive, Output Type=Fixed, Packaging="Cut Tape", Pricing 1="1=0,91000, 10=0,81400, 25=0,77280, 100=0,63490, 250=0,59344, 500=0,52444, 1000=0,41404 (USD)", RoHS=Yes, RoHS Compliant=Yes, Stock 1=91850, Supplier 1=Digi-Key
USB1: "CONN RCP USB2.0 TYP C 24P SMD RA", Manufacturer="Global Connector Technology", Supplier Part Number 1=2073-USB4105-GF-ACT-ND, Category="USB Connectors", Manufacturer Part Number=USB4105-GF-A, RoHS=No, Supplier 1=Digi-Key

## Via types
v1: diameter 0.6, hole 0.3, Top Layer to Bottom Layer, 7 vias

## Nets (pads, with @x,y where several pads share a name; then routed paths per layer and width w, separated by ;. In a path a pad name is that pad's centre, name@x,y a point inside that pad or via, vN(x,y) a via of type N, cw(c..) or ccw(c..) an arc to the next point about the centre after c; other vN are vias at no path point)
+3.3V: BOOT.A1 BOOT.A2 C3.1 C4.1 C6.1 P2.5 P3.5 P4.5 P5.5 P6.1 P6.2 P6.3 R7.2 U0.4 U1.4 U2.5 | length 22.2
  Top Layer w0.25: U0.4 29.629,25.779 29.629,27.139 29.75,27.26 U1.4 ; U2.5 51.05,44.35 C6.1 C6.1@51.6,44.8 ; BOOT.A1 BOOT.A2 50.075,53.825 52.9,51 52.9,45.6 52.375,45.075 51.775,45.075 51.6,44.9 C6.1@51.6,44.8 ; R7.2 C6.1@51.6,44.8
ADC1_IN0: P1.1 U0.7 U1.7 | length 2.1
  Top Layer w0.254: U1.7 31.25,27.169 31.894,26.525 31.894,25.856 U0.7
ADC1_IN1: P1.2 U0.8 U1.8 | length 2.5
  Top Layer w0.254: U1.8 31.75,27.493 31.752,27.491 32.109,27.491 32.8,26.8 U0.8
ADC1_IN2: P1.3 U0.9 U1.9 | length 2.5
  Top Layer w0.254: U1.9 32.435,27.74 32.975,27.2 U0.9
CC1: R4.2 USB1.A5 | length 5.6
  Top Layer w0.381: USB1.A5@43.25,53 USB1.A5 43.25,49.75 44.2,48.8 45.1,48.8 R4.2
CC2: R5.2 USB1.B5 | length 5.4
  Top Layer w0.381: R5.2 39.7,48.7 40.25,49.25 USB1.B5 USB1.B5@40.25,53
CS1: P4.4 U0.29 U1.29 | length 1.9
  Top Layer w0.25: U0.29 26.698,29.6 26.848,29.75 U1.29
CS2: P5.4 U0.28 U1.28 | length 1.9
  Top Layer w0.25: U0.28 26.667,30.4 26.817,30.25 U1.28
D*_N: D1.2 U0.22 U1.22 USB1.A7 USB1.B7 | length 30.7
  Top Layer w0.254: v1(28.8,35.673) 28.8,35.579 28.654,35.433 28.654,34.872 28.677,34.849 28.677,34.373 U0.22 28.923,34.127 28.923,33.376 29.25,33.049 U1.22 ; USB1.A7@41.754,52.323 41.754,51.8 42.133,51.421 42.75,51.421 USB1.B7@42.75,52.537 ; v1@41.903,45.066 42.266,45.066 D1.2@42.95,45.75 ; 42.2,51.421 42.2,47.02 42.254,46.966 42.254,46.323 42.403,46.174 42.526,46.174 D1.2@42.95,45.75 ; D1.2 D1.2@42.95,45.75
  Bottom Layer w0.254: 29.146,35.783 33.328,35.783 41.654,44.109 41.654,44.76 41.8,44.906 v1(41.8,45)
D*_P: D1.3 U0.23 U1.23 USB1.A6 USB1.B6 | length 31.7
  Top Layer w0.254: U1.23@28.742,32.29 28.742,32.839 28.436,33.145 28.429,33.145 28.123,33.45 28.123,34.127 U0.23 28.123,34.373 28.123,34.849 28.146,34.872 28.146,35.802 28.744,36.4 v1(28.8,36.4) ; v1@41,45.088 D1.3 41.05,45.75 41.474,46.174 41.597,46.174 41.746,46.323 41.746,46.756 41.692,46.81 41.692,51.144 41.246,51.59 41.246,52.541 USB1.B6 41.273,52.568 41.273,53.152 41.495,53.374 42.026,53.374 42.227,53.173 42.227,52.568 USB1.A6
  Bottom Layer w0.254: v1(28.8,36.4) 28.866,36.334 29.102,36.334 29.146,36.291 33.118,36.291 41.146,44.319 41.146,44.76 41,44.906 v1(41,45)
EXTI0: P2.3 U0.15 U1.15 | length 2.4
  Top Layer w0.254: U1.15 32.437,31.252 33.051,31.252 33.2,31.401 33.2,31.8 33.4,32 U0.15
EXTI1: P2.4 U0.16 U1.16 | length 2.5
  Top Layer w0.254: U1.16 32.507,31.75 32.509,31.752 32.509,32.109 33.2,32.8 U0.16
EXTI2: U0.17 U1.17 | length 2.5
  Top Layer w0.25: U1.17 32.135,32.435 32.8,33.1 U0.17
EXTI4: P3.3 U0.11 U1.11 | length 2
  Top Layer w0.254: U1.11 33.15,29.25 33.477,28.923 34.127,28.923 U0.11
EXTI5: P3.4 U0.12 U1.12 | length 1.9
  Top Layer w0.254: U1.12 32.437,29.748 33.191,29.748 33.339,29.6 U0.12
GND: C1.2 C2.2 C3.2 C4.2 C5.2 C6.2 C7.2 D1.1 D2.2 D3.2 D4.2 D5.2 D6.2 J1.1 J1.2 J2.1 J2.2 J3.1 J3.2 J4.1 J4.2 P2.6 P3.6 P4.6 P5.6 P7.1 P7.2 P7.3 R4.1 R5.1 R8.1 RST.B1 RST.B2 U0.5 U1.5 U1.33 U2.2 USB1.A1_B12 USB1.B1_A12 USB1.S1 USB1.S2 USB1.S3 USB1.S4 | length 27.8
  Top Layer w0.25: U1.5 30.25,26.25 30.4,26.1 U0.5 ; J2.1 J2.2
  Top Layer w0.381: D5.2 USB1.S4@37.68,53.6 ; USB1.S4 USB1.S4@37.68,53.6 ; USB1.S3 USB1.S4@37.68,53.6 ; R5.1@38.8,50.832 USB1.B1_A12 38.8,52.82 38.02,53.6 USB1.S4@37.68,53.6 ; R4.1@45.2,50.387 USB1.A1_B12 45.2,52.82 45.31,52.93 46.129,52.93 USB1.S1 USB1.S2 ; R4.1 46.3,50.5 C5.2 48.915,47.884 48.915,47.135 U2.2
I2C2_SCL: P2.2 P3.2 U0.14 U1.14 | length 2
  Top Layer w0.254: U1.14 32.437,30.752 33.09,30.752 33.519,31.181 34.231,31.181 U0.14
I2C2_SDA: P2.1 P3.1 U0.13 U1.13 | length 1.9
  Top Layer w0.254: U1.13 32.437,30.252 33.129,30.252 33.277,30.4 U0.13
LED1: R1.2 U0.1 U1.1 | length 2.5
  Top Layer w0.254: U0.1 27.2,26.8 27.9,27.5 28.248,27.5 28.25,27.502 U1.1
LED2: R2.2 U0.2 U1.2 | length 2.1
  Top Layer w0.254: U0.2 28.123,25.873 28.123,26.51 28.75,27.137 U1.2
LED3: R3.2 U0.3 U1.3 | length 2
  Top Layer w0.254: U0.3 28.923,25.873 28.923,26.723 29.25,27.05 U1.3
NetC7_1: C7.1 RST.A1 RST.A2 U0.6 U1.6 | length 3.6
  Top Layer w0.25: C7.1 54.575,52.675 RST.A2
  Top Layer w0.254: U1.6 30.75,26.85 31.1,26.5 31.1,25.85 U0.6
NetD2_1: D2.1 R1.1
NetD3_1: D3.1 R2.1
NetD4_1: D4.1 R3.1
NetD5_1: D5.1 R6.1
NetD6_1: D6.1 R7.1 | length 1.5
  Top Layer w0.254: D6.1 R7.1
PA3: P1.4 U0.10 U1.10 | length 2.2
  Top Layer w0.254: U1.10 32.437,28.748 33.052,28.748 33.2,28.6 33.2,28.4 33.477,28.123 34.127,28.123 U0.10
PA14: BOOT.B1 BOOT.B2 R8.2 U0.25 U1.25 | length 8.2
  Top Layer w0.25: U0.25 26.9,32.8 27.565,32.135 U1.25 ; BOOT.B1 BOOT.B2 47.925,52.675 R8.2
PA15: U0.26 U1.26 | length 2.1
  Top Layer w0.25: U0.26 26.422,32 27.172,31.25 U1.26
PB3: P1.5 U0.27 U1.27 | length 2
  Top Layer w0.25: U0.27 26.6,31.2 27.05,30.75 U1.27
SPI2_MISO: P4.3 P5.3 U0.30 U1.30 | length 2
  Top Layer w0.25: U0.30 25.785,28.835 26.465,28.835 26.881,29.25 U1.30
SPI2_MOSI: P4.2 P5.2 U0.31 U1.31 | length 2.4
  Top Layer w0.25: U0.31 26.621,28 26.767,28.146 26.767,28.604 26.914,28.75 U1.31
SPI2_SCK: P4.1 P5.1 U0.32 U1.32 | length 2.5
  Top Layer w0.25: U0.32 27,27.2 27.565,27.765 U1.32
SWDIO: U0.24 U1.24 | length 2.5
  Top Layer w0.25: U0.24 27.2,33.2 27.9,32.5 28.25,32.5 U1.24
TIM1_CH3: U0.21 U1.21 | length 1.9
  Top Layer w0.254: U0.21 29.6,33.269 29.748,33.121 29.748,32.437 U1.21
TIM2_CH3: U0.20 U1.20 | length 1.9
  Top Layer w0.25: U1.20 30.25,33.183 30.4,33.333 U0.20
USART1_RX: U0.18 U1.18 | length 2.3
  Top Layer w0.25: U1.18 31.25,33.05 31.4,33.2 31.7,33.2 31.875,33.375 31.875,34.125 U0.18
USART1_TX: U0.19 U1.19 | length 2
  Top Layer w0.25: U1.19 30.75,33.15 31.075,33.475 31.075,34.125 U0.19
VBUS: C1.1 C2.1 C5.1 D1.4 R6.2 U2.1 U2.3 USB1.A4_B9 USB1.B4_A9 | length 40.6
  Top Layer w0.381: R6.2 36,59 38.7,59 39.753,57.948 39.753,53.354 39.709,53.311 39.709,52.654 USB1.B4_A9 v1(39.6,51.5) ; v1@36.872,47.229 36.9,47.201 C1.1 C2.1 ; U2.3 48.05,46.15 48.6,45.6 49.6,45.6 49.95,45.95 U2.1 49.925,47.075 49.925,48.675 C5.1 49.9,49.786 49.79,49.895 v1(49.79,49.955)
  Bottom Layer w0.381: v1(39.6,51.5) 39.6,50 v1(36.9,47.3) 44,47.3 46.655,49.955 v1(49.79,49.955)
pads on no net: U2.4 USB1. USB1.A8 USB1.B8

## Silkscreen, mask and mechanical layers (free items; w line width, h text height)
Bottom Designator:
  circle w0: c57,3 r1.1
  circle w0: c57,57 r1.1
  circle w0: c3,57 r1.1
  circle w0: c3,3 r1.1
Top Component Outline:
  the board outline again, w0.254

## Text inside footprints (layer, text, board x,y; h text height)
USB1: Mechanical 1 "PCB EDGE" at 36.6,59.8 h0.41 r180